# Altium PCB TE0123.V2_Placa_2022-08-20.pcbdoc (part 2 of 2)
Units mil, origin at the board's own origin, x right, y up, seen from the top; angles counter-clockwise.
Board outline 7202.22 x 3893.5 mil, 2 copper layers (Top Layer, Bottom Layer); 145 components, 165 nets, 586 pads, 199 vias.
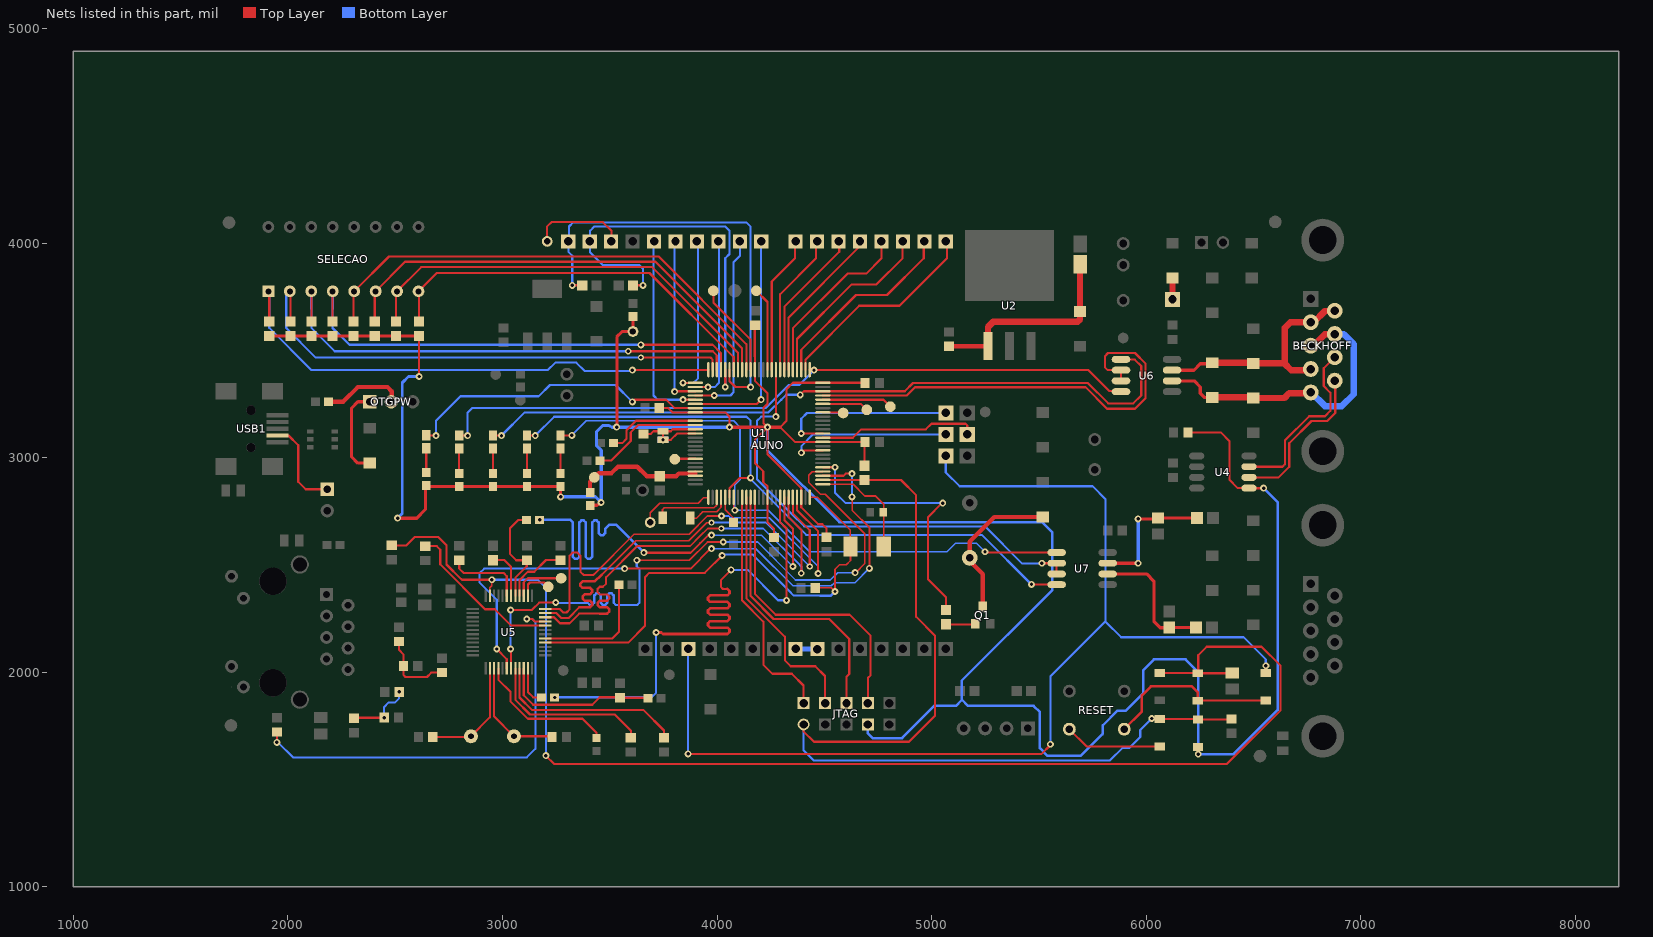
[diagram p2: the nets of this part, all layers, seen from the top]

## Via types
v1: diameter 32.28, hole 15.75, Top Layer to Bottom Layer, 193 vias
v2: diameter 28.35, hole 15.75, Top Layer to Bottom Layer, 6 vias

## Nets (pads, with @x,y where several pads share a name; then routed paths per layer and width w, separated by ;. In a path a pad name is that pad's centre, name@x,y a point inside that pad or via, vN(x,y) a via of type N, cw(c..) or ccw(c..) an arc to the next point about the centre after c; other vN are vias at no path point) (continued)
PTA13/LLWU_P4: R16.1 U1.43 | length 2788.5
  Top Layer w10: 4048,2388 4028,2388 4018,2398 4018,2418 4018,2429 v1(4066,2477) ; U1.43@4294.2,2815.6 4294.2,2699.3 4323.7,2669.8 v1(4323.7,2335.2)
  Top Layer w12: R16.1@3242.3,1882.3 3242.6,1882 v1(3243,1882) ; v1(3716,2185) 3739,2185 3749,2178 3749.8,2178 4048,2178 4058,2188 4058,2198 4048,2208 3968,2208 3958,2218 3958,2228 3968,2238 4048,2238 4058,2248 4058,2258 4048,2268 3968,2268 3958,2278 3958,2288 3968,2298 4048,2298 4058,2308 4058,2318 4048,2328 3968,2328 3958,2338 3958,2348 3968,2358 4048,2358 4058,2368 4058,2378 4048,2388
  Bottom Layer w10: v1(3243,1882) 3243,1883 3694.5,1883 3716,1904.5 v1(3716,2185) ; v1(4066,2477) 4142.6,2477 4284.4,2335.2 v1(4323.7,2335.2)
PTA14: R9.2 U1.44 | length 2433.1
  Top Layer w9.84: v1(3659,2557) 3877,2557 3920.9,2600.9 3959,2639 v1(3974,2639)
  Top Layer w10: U1.44@4313.9,2815.6 4313.9,2709.2 4353.3,2669.8 v1(4353.3,2492.6)
  Top Layer w12: R9.2@3173.2,2709.6 3173.6,2710 v1(3174,2710)
  Bottom Layer w8: v1(3974,2639) 4206.9,2639 v1(4353.3,2492.6)
  Bottom Layer w12: v1(3174,2710) 3316,2710 3328,2698 3328,2538 3338,2528 3348,2528 3358,2538 3358,2698 3368,2708 3378,2708 3388,2698 3388,2538 3398,2528 3408,2528 3418,2538 3418,2698 3428,2708 3438,2708 3448,2698 3448,2648 3458,2638 3468,2638 3478,2648 3478,2668 3498,2688 3528,2688 v1(3659,2557)
PTA15: U1.45 U5.34 | length 2136.6
  Top Layer w8: 3628,2588 3875,2588 3920.18,2633.18 3957,2670 v2(4020,2670)
  Top Layer w10: U5.34@3198.95,2256.1 3239.9,2256.1 3268,2228 3313,2228 3358,2273 3453,2273 ; 3488,2333 3498,2343 3498,2353 3488,2363 3453,2363 3443,2373 3443,2388 3453,2398 3468,2398 3483,2413 3483,2443 3628,2588 ; U1.45@4333.6,2815.6 4333.6,2722.4 4393,2663 4393,2494 ; v1@4392.6,2462.4 4393,2495
  Top Layer w12: 3453,2273 3488,2273 3498,2283 3498,2293 3495.7,2295.3 3488,2303 3453,2303 3443,2313 3443,2323 3453,2333 3488,2333
  Bottom Layer w8: v2(4020,2670) 4216,2670 4388,2498
  Bottom Layer w10: 4388,2498 4393,2493 4393,2461.8 v1(4392.6,2461.4)
PTA16: U1.46 U5.35 | length 2099.8
  Top Layer w8: 3462,2454 3621,2613 3867.5,2613 3952.5,2697 v2(3974,2697)
  Top Layer w10: U5.35@3198.95,2276.1 3249.9,2276.1 3273,2253 3308,2253 3358,2303 3373,2303 ; U1.46@4353.3,2815.6 4353.3,2740.7 4432,2662 4432,2493 v2@4429,2493
  Top Layer w12: 3373,2303 3408,2303 3418,2313 3418,2323 3415.7,2325.3 3408,2333 3383,2333 3373,2343 3373,2353 3383,2363 3408,2363 3418,2373 3418,2383 3408,2393 3373,2393 3363,2403 3363,2413 3373,2423 3429,2423 3462,2454
  Bottom Layer w8: v2@3965,2698 4227,2698 4425.5,2499.5 v2@4420,2494
  other v2: 4432.03,2492.6
PTA17: U1.47 U5.36 | length 2271
  Top Layer w8: 3425,2455 3613,2643 3870,2643 3955,2728 v1(4021,2728)
  Top Layer w10: U5.36@3198.95,2295.1 3265.9,2295.1 3283,2278 3298,2278 3313,2293 3313,2533 3313,2543 3328,2558 3348,2558 3363,2543 3363,2468 3378,2453 3423,2453 3425.5,2455.5 ; U1.47@4373,2815.6 4373,2754.9 4471.4,2656.6 4471.4,2492.6 v1(4471,2460)
  Bottom Layer w8: v1(4021,2728) 4055.1,2728 4062.1,2720 4244,2720 4471.4,2492.6
  Bottom Layer w10: v1(4471,2460) 4471.4,2460.4 4471.4,2492.6
PTA18: C30.2 MAIN.1 U1.50 U5.28 | length 2434.5
  Top Layer w8: U1.50@4432,2815.6 4468.4,2815.6 4621,2663 4621,2653.1 4621,2593 MAIN.1@4622,2586 4622,2521 4602,2501 4593.1,2501 4571,2501 4550,2480 v1(4550,2376) 4533,2393 C30.2@4457.85,2393
  Top Layer w9.84: U5.28@3198.9,2138.1 3585.3,2138.1 3664.3,2217.1 3664.3,2443.4 3684,2463.1 3943.1,2463.1 4028.7,2548.7 v1(4024,2544)
  Bottom Layer w10: v1@4028,2548 4167,2548 4333.9,2381.1 4358,2357 4433,2357 4480.1,2357
  Bottom Layer w12: 4480.1,2357 4531,2357 v1(4550,2376)
PTB0/LLWU_P5: U1.53 U5.18 | length 3086.6
  Top Layer w8: v1(4628.9,2817.4) 4630,2816.3 4630,2754 4711,2673 4711,2482 4710,2483 v1(4710,2484)
  Top Layer w9.84: v1(2973,2108) 3019.9,2061.1 U5.18@3019.9,2018.1
  Top Layer w10: v1(3569,2483) 3877,2483 3969,2575 3973,2575 v1(3974,2576) ; U1.53@4493,2915.9 4589.5,2915.9 4599.3,2925.7 v1(4628.9,2925.7)
  Bottom Layer w8: v1(3974,2576) 4181,2576 4354,2403 4533,2403 4547.7,2417 4643,2417 v1(4710,2484)
  Bottom Layer w9.84: v1(2973,2108) 2973,2337.5 2892,2418.5 2892,2443.9 2892,2461 2914,2483 v1(3569,2483) ; v1(4628.9,2925.7) v1@4628.98,2817.43
PTB1: U1.54 U5.19 | length 3083.7
  Top Layer w8: v1(3626,2522) 3871,2522 3956,2607 v1@4030,2607 ; U1.54@4493,2935.6 4444,2935 4427,2918 4427,2884 4482,2829 4505,2829 4689,2645 4689,2507 4646,2464 v1(4644,2464)
  Top Layer w9.84: v1(3038,2108) 3039.9,2106.1 U5.19@3039.9,2018.1 ; v1(3038,2290) 3137,2290 3151.6,2304.6 3152.5,2305.6 3170.8,2324 3248,2324 v1(3248,2325)
  Bottom Layer w8: v1@4030,2607 4189.7,2607 4366,2430 4527.96,2430 4561.96,2464 v1(4644,2464)
  Bottom Layer w9.84: v1(3038,2108) v1(3038,2290)
  Bottom Layer w10: v1(3248,2325) 3250,2323 3398,2323 3408,2313 3418,2313 3428,2323 ; 3518,2323 3528,2313 3628,2313 3638,2323 3638,2482 3626,2494 v1(3626,2522)
  Bottom Layer w12: 3428,2323 3428,2358 3438,2368 3448,2368 3458,2358 3458,2323 3468,2313 3478,2313 3488,2323 3488,2358 3495.7,2365.7 3498,2368 3508,2368 3518,2358 3518,2323
  other v1: 4029,2607
PTB2: R12.2 U1.55 | length 1261.8
  Top Layer w9.84: U1.55@4493,2955.3 v1(4550.1,2955.2)
  Top Layer w10: v1(5052.1,2787.9) 5047.9,2787.9 4983,2723 4983,2433 5068,2348 R12.2@5068,2289.9
  Bottom Layer w9.84: v1(4550.1,2955.2) 4550.1,2837.2 4599.3,2787.9 v1(5052.1,2787.9)
PTB11: AUNO.34 U1.59 | length 831.4
  Top Layer w10: v1(4393,3023) 4404.1,3034.1 U1.59@4493,3034.1
  Bottom Layer w10: v1(4393,3023) 4393,3054 4447.4,3108.4 AUNO.34@5066.3,3108.4
PTB16: AUNO.36 U1.62 | length 745.8
  Top Layer w10: U1.62@4493,3093 4633,3093 4671.9,3131.9 4973.3,3131.9 4999.8,3158.4 5158.4,3158.4 5166.3,3150.5 AUNO.36@5166.3,3108.4
PTB17: AUNO.33 U1.63 | length 854.1
  Top Layer w10: v1(4392.6,3112.7) 4492.9,3112.7 U1.63@4493,3112.8
  Bottom Layer w10: v1(4392.6,3112.7) 4392.6,3181.6 4419.4,3208.4 AUNO.33@5066.3,3208.4
PTC2: U1.72 U6.2 U6.3 | length 2141.6
  Top Layer w9.84: U6.3@5883,3358 U6.2@5883,3408
  Top Layer w10: U1.72@4493,3290 4885,3290 4923,3328 5718,3328 5818,3228 5948,3228 5998,3278 5998,3438 5948,3488 5822.6,3488 5808,3472.6 5808,3422 5822,3408 U6.2@5883,3408
PTC3/LLWU_P7: RXM.1 U1.73 U6.1 | length 3422
  Top Layer w9.84: RXM.1@2955.6,3103.49 v1(2995,3102.9) ; v1(4388,3293) 4404.7,3309.7 U1.73@4493,3309.7
  Top Layer w10: U1.73@4493,3309.7 4874.8,3309.7 4913.3,3348 5727.9,3348 5823,3253 5892.5,3253 5940.4,3253 5977.3,3290 5977.3,3427.6 5947.8,3457.2 U6.1@5883,3458
  Bottom Layer w10: v1@2995,3103 3103.3,3211.1 4240,3211 4299,3270 4322,3293 v1(4388,3293)
PTC4/LLWU_P8: TXM.1 U1.76 U6.4 | length 3337.7
  Top Layer w9.84: TXM.1@2797.9,3103.49 v1(2837.5,3102.9)
  Top Layer w10: U1.76@4432,3410 4432,3408 5731.2,3408 5829.7,3310 5881.4,3310 U6.4@5883,3308
  Bottom Layer w10: v1@2837.5,3103 2837.5,3210.8 2857.9,3231 4225.9,3231 4289,3294 4334,3339 4382.8,3339 v1@4451.8,3408
  other v1: 4451.8,3407.9
PTC5/LLWU_P9: AUNO.1 U1.77 | length 983.4
  Top Layer w10: U1.77@4412.3,3410 4412.3,3457.2 4663.2,3708 4850.2,3708 5071.8,3929.6 5071.8,4002.9 AUNO.1@5066.3,4008.4
PTC6/LLWU_P10: AUNO.2 U1.78 | length 920.3
  Top Layer w10: U1.78@4392.7,3410 4392.7,3502.7 4648,3758 4791.9,3758 4963.5,3929.7 4963.5,4005.6 AUNO.2@4966.3,4008.4
PTC7: AUNO.3 U1.79 | length 870.3
  Top Layer w10: U1.79@4373,3410 4373,3553 4628,3808 4743.4,3808 4865.1,3929.7 4865.1,4007.2 AUNO.3@4866.3,4008.4
PTC8: AUNO.4 U1.80 | length 820.6
  Top Layer w10: U1.80@4353.3,3410 4353.3,3603.3 4608,3858 4695,3858 4766.8,3929.8 AUNO.4@4766.3,4008.4
PTC9: AUNO.5 U1.81 | length 737.8
  Top Layer w10: U1.81@4333.6,3410 4333.6,3653.6 4668.2,3988.2 4668.2,4006.5 AUNO.5@4666.3,4008.4
PTC10: AUNO.6 U1.82 | length 705.8
  Top Layer w10: U1.82@4313.9,3410 4313.9,3703.9 4569.8,3959.8 4569.8,4004.9 AUNO.6@4566.3,4008.4
PTC11/LLWU_P11: AUNO.7 U1.83 | length 669.7
  Top Layer w10: U1.83@4294.2,3410 4294.2,3762.3 4461.5,3929.6 4461.5,4003.6 AUNO.7@4466.3,4008.4
PTC13: AUNO.8 U1.85 | length 644.5
  Top Layer w10: U1.85@4254.9,3410 4254.9,3821.4 4363.1,3929.6 4363.1,4005.2 AUNO.8@4366.3,4008.4
PTC17: R15.1 SELECAO.5 U1.91 | length 2326.3
  Top Layer w10: R15.1@2306.1,3634.35 2306.1,3773.3 SELECAO.5@2308.5,3775.7 2470.8,3938 3728,3938 4136.7,3529.3 U1.91@4136.7,3410
PTD4/LLWU_P14: R18.1 SELECAO.4 U1.97 | length 2249
  Top Layer w10: R18.1@2208.1,3634.35 2208.1,3775.3 SELECAO.4@2208.5,3775.7 ; v1(3644.6,3526.1) 3979.3,3526.1 4018.6,3486.8 U1.97@4018.6,3410
  Bottom Layer w10: SELECAO.4@2208.5,3775.7 2207.6,3604.8 2286.4,3526.1 v1(3644.6,3526.1)
PTE2/LLWU_P1: AUNO.13 U1.3 | length 800.5
  Top Layer w9.84: v1(3802,3308) 3802,3309.7 U1.3@3898.6,3309.7
  Bottom Layer w10: v1(3802,3308) 3802,3329.2 3802.1,3329.3 3802.1,4004.2 AUNO.13@3806.3,4008.4
PTE6: HB.1 U1.7 | length 1445.9
  Top Layer w9.84: HB.1@2644.3,3103.89 2688.9,3103.9 v1(2689.9,3102.9)
  Top Layer w10: v1(3605.2,3260.4) 3615,3270.2 3762.8,3270.2 3802.1,3230.9 U1.7@3898.6,3230.9
  Bottom Layer w10: v1@2689.9,3103 2689.9,3171.8 2804.1,3286 3168.4,3286 3221.4,3339 3526.5,3339 v1@3605.2,3260
Q1_1: Q1.1 R12.1 | length 137.5
  Top Layer w10: R12.1@5068,2222.95 5200.75,2222.95 Q1.1@5204.1,2226.3
Q1_3: D13.1 Q1.3 SPK.- | length 715.1
  Top Layer w20: Q1.3@5239.1,2306.3 5239.1,2456.9 5178,2518 SPK.-@5178,2533 5178,2586 5178,2608.7 5292.3,2723 D13.1@5518.05,2723
R14_1: R9.1 R14.1 U5.41 | length 493.6
  Top Layer w9.84: U5.41@3059.9,2356.1 3059.9,2439.9 3113.1,2493.1 3113.1,2520.6 R14.1@3114.5,2522 3064,2522 3034.4,2551.6 3034.4,2669.8 3073.7,2709.2 R9.1@3112.61,2709.6
R17_1: R17.1 U5.40 | length 303.8
  Top Layer w10: U5.40@3078.9,2356.05 3078.9,2428.9 3118,2468 3148,2468 3203,2523 3270,2523 R17.1@3270.6,2522.4
R22_2: HB.2 R22.2 | length 112.4
  Top Layer w9.84: HB.2@2644.3,3043.29 2644.5,3043.1 R22.2@2644.4,2931
R23_2: R23.2 TXM.2 | length 116.2
  Top Layer w9.84: R23.2@2797.9,2926.7 TXM.2@2797.9,3042.89
R25_2: R25.2 TXE.2 | length 116.2
  Top Layer w9.84: R25.2@3113.8,2926.7 TXE.2@3113.8,3042.89
R27_2: R27.2 R36.2 U5.22 | length 739.9
  Top Layer w10: U5.22@3098.9,2018.05 3098.9,1892.1 3143,1848 3418,1848 3453,1883 3546.15,1883 R27.2@3548,1881.15 ; R27.2@3548,1881.1 3674.9,1881.1 R36.2@3678,1878
R29_2: R29.2 U5.32 | length 752.5
  Top Layer w10: R29.2@2640,2587.6 2693.4,2587.6 2709.6,2571 2709.6,2503 2918.6,2293.4 2963.9,2293.4 3040.3,2217 U5.32@3198.9,2217
R30_2: R30.2 U5.21 | length 907
  Top Layer w9.84: U5.21@3078.9,2018.1 3078.9,1882.1 3138,1823 3658,1823 3753,1728 R30.2@3753,1694.9
R31_2: R31.2 U5.20 | length 777.5
  Top Layer w9.84: U5.20@3059.9,2018.1 3059.9,1871.1 3128,1803 3523,1803 3598,1728 R31.2@3598,1694.9
R32_2: R32.2 U5.16 | length 663.7
  Top Layer w9.84: U5.16@2980.9,2018.05 2980.9,1965.1 3038,1908 3038,1862.9 3118.1,1783 3372.9,1783 3438,1718 R32.2@3438,1693
R38_1: OTGPW.2 R38.1 | length 381.4
  Top Layer w20: R38.1@2188.5,3260.4 2256.9,3260.4 2325.7,3329.3 2463.5,3329.3 2483.2,3309.6 2483.2,3262 OTGPW.2@2481.5,3260.3
R40_1: R40.1 U5.42 | length 232
  Top Layer w10: R40.1@2956.2,2522.2 3008.1,2522.9 3039.9,2491.1 U5.42@3039.9,2356.05
R41_1: R41.1 U5.43 | length 367.4
  Top Layer w9.84: R41.1@2798.5,2522 2798.16,2521.66 2798.16,2482.81 2817.85,2463.12 3004.85,2463.12 3019.9,2448.07 U5.43@3019.9,2356.1
R44_1: C27.2 R44.1 R46.1 | length 307.9
  Top Layer w10: C27.2@2308,1784.9 2311.1,1788 v1(2448,1788)
  Bottom Layer w10: v1(2448,1788) 2448,1838 2468,1858 2498,1858 2518,1878 v1(2518,1908)
R47_1: C28.1 R47.1 R48.1 | length 355.5
  Top Layer w10: C28.1@2517.1,2143.1 2517.1,2103.9 2538,2083 2538,2028.89 R48.1@2538.12,2028.77 2538,2028.65 2538,1988 2548,1978 2648,1978 2668.12,1998.12 R47.1@2717.13,1998.12
RESET_3: D3.1 RESET.3 | length 454.6
  Top Layer w10: RESET.3@5642.3,1734.3 5722.8,1653.8 D3.1@6063.6,1653.8
RESET_4: D4.1 D5.1 RESET.4 | length 836.8
  Top Layer w10: D4.1@6241.1,1867.3 6556.4,1867.3 D5.1@6557.2,1868.1
  Top Layer w12: RESET.4@5898.2,1734.3 5980,1816 5980,1892 6022,1934 6213,1934 6240,1907 6240,1868.4 D4.1@6241.1,1867.3
RESET_B: C2.2 D3.2 D6.2 JTAG.1 R2.1 U1.52 | length 4482.8
  Top Layer w9.84: v1(6026.5,1784) 6028.7,1781.8 D3.2@6063.6,1781.8
  Top Layer w10: JTAG.1@4403.3,1756.3 4402.5,1724.9 4451.7,1675.7 4894.6,1675.7 5016,1797 5016,2170.5 4928,2258 4928,2825 4857.4,2896.1 4687.4,2896.1 4687.2,2896.3 U1.52@4493,2896.3 ; D3.2@6063.6,1781.8 6239.6,1781.8 D6.2@6241.8,1779.6 6395.9,1779.6 C2.2@6398.5,1782.2
  Bottom Layer w10: JTAG.1@4403.3,1756.3 4403.3,1635.5 4449.7,1589 5831.7,1589 5891,1648 5923,1648 5973,1698 5972.8,1730.3 v1(6026.5,1784)
RST#: C14.2 D4.2 D12.2 R8.1 U5.47 | length 6360.3
  Top Layer w8: U5.47@2940.9,2356.05 2940.9,2393.9 2950,2403 v1(2950,2431)
  Top Layer w10: R8.1@2484,2592 2484,2591.1 2552.1,2591.1 2591.5,2630 2699.7,2630 2739.1,2591.1 2739.1,2502 2808,2433.6 2810.6,2431 v1(2950,2431) ; v1(3202,1611) 3241,1572 6375.5,1572 6626.9,1823.4 6626.9,2030 6538.3,2118.6 6282.4,2118.6 6243,2079.3 6243,1993.4 D4.2@6241.1,1995.3 ; D12.2@6064.2,1996.5 6239.9,1996.5 D4.2@6241.1,1995.3 ; C14.2@6400.5,1996.6 6391.5,1995.3 D4.2@6241.1,1995.3
  Bottom Layer w10: v1(2950,2431) 3164.9,2431 3201.7,2394.2 3202,2393.9 v1(3202,1611)
RSTSHIELD: AUNO.30 AUNO.35 D5.2 | length 5206.7
  Top Layer w9.84: D5.2@6557.2,1996.1 6558,1996.9 v1(6558,2030)
  Top Layer w10: v1(3865,1619) 3866,1618 5511,1618 5554,1661 v1(5554,1664)
  Bottom Layer w9.84: v1(3865,1619) 3865,2104 AUNO.30@3866.3,2108.4
  Bottom Layer w10: AUNO.35@5066.3,3008.4 5066.3,2931.2 5130.8,2866.7 5750.9,2866.7 5810,2807.6 5810,2236.7 ; v1(5554,1664) 5554,1980.7 5810,2236.7 ; v1(6558,2030) 6558,2059.6 6454.6,2163 5883.7,2163 5810,2236.7
RXE_2: R26.2 RXE.2 | length 116.2
  Top Layer w9.84: R26.2@3270,2926.7 RXE.2@3270,3042.89
RXM_2: R24.2 RXM.2 | length 116.2
  Top Layer w9.84: R24.2@2955.6,2926.7 RXM.2@2955.6,3042.89
S$12081: 
S$12083: 
S$12085: 
S$12087: 
S$12089: 
S$13048: 
S$13052: 
S$13055: 
S$13059: 
S$13061: 
S$13065: 
S$18142: pad.539@4808,3238 U1.71 | length 328.4
  Top Layer w10: U1.71@4493,3270.3 4775.7,3270.3 pad.539@4808,3238
S$18144: pad.539@4698,3223 U1.70 | length 216.4
  Top Layer w10: U1.70@4493,3250.6 4670.4,3250.6 pad.539@4698,3223
S$18146: pad.539@4588,3208 U1.68 | length 96.3
  Top Layer w10: U1.68@4493,3211.2 4584.8,3211.2 pad.539@4588,3208
S$19341: pad.539@3688,2698 U1.26 | length 346.7
  Top Layer w8: pad.539@3688,2698 3688,2743 3733,2788 3912,2788 3937,2813 3957,2813 U1.26@3959.6,2815.6
S$19352: RTC.1 U1.28 | length 336.3
  Top Layer w8: RTC.1@3746,2720 3746,2758 3754,2766 3986,2766 3998.9,2778.9 U1.28@3998.9,2815.6
S$29859: RTC.2 U1.29 | length 210.8
  Top Layer w8: RTC.2@3875.7,2718.1 3904.1,2718.1 3923,2737 3934,2748 3998,2748 4018.6,2768.6 U1.29@4018.6,2815.6
S$30932: pad.539@3983,3778 U1.90 | length 439.8
  Top Layer w10: pad.539@3983,3778 3983,3723 4156.4,3549.6 U1.90@4156.4,3410
S$31568: pad.539@4183,3778 U1.86 | length 389.6
  Top Layer w10: pad.539@4183,3778 4235.2,3725.8 U1.86@4235.2,3410
S$43030: pad.539@3803,2993 U1.19 | length 96.3
  Top Layer w10: pad.539@3803,2993 3804.7,2994.7 U1.19@3898.6,2994.7
S$61242: 
S$61244: 
S$61246: 
S$61866: 
S$69002: pad.539@3273,2438 U5.39 | length 244.8
  Top Layer w10: U5.39@3098.9,2356.1 3098.9,2418.9 3118,2438 pad.539@3273,2438
S$69008: pad.539@3213,2398 U5.38 | length 159
  Top Layer w10: U5.38@3118.9,2356.1 3118.9,2408.9 3128,2418 3193,2418 pad.539@3213,2398
S$72862: U1.30 VBAT+.1 | length 133.6
  Top Layer w8: U1.30@4038.3,2815.6 4038.3,2757.7 4048,2748 4077,2719 VBAT+.1@4077,2698
S$73513: AUNO.16 pad.539@3208,4008 | length 448.6
  Top Layer w10: pad.539@3208,4008 3208,4078 3228,4098 3468,4098 3508,4058 3508,4053.5 3508,4006.7 AUNO.16@3506.3,4008.4
S$84447: 
S$84451: 
S$85002: 
S$164278: AUNO.25 pad.25 | length 101.9
  Bottom Layer w25: AUNO.25@4366.3,2108.4 4467.6,2108.4 pad.25@4468,2108
S$169262: D21.1 pad.38 | length 100
  Top Layer w30: pad.38@6123,3738 D21.1@6123.05,3838
S$192734: 
S$192736: 
TCK/SWDCLK: JTAG.2 U1.34 | length 1130.6
  Top Layer w10: U1.34@4117.1,2815.6 4117.1,2333.9 4216,2235 4216,2035 4258,1993 4348,1993 4403.1,1937.9 JTAG.2@4403.35,1856.25
TDI: JTAG.4 U1.35 | length 1179.3
  Top Layer w10: U1.35@4136.7,2816 4136.7,2344.3 4316,2165 4316,2055 4343,2028 4458,2028 4503.4,1982.6 JTAG.4@4503.4,1856
TDO/SWO: JTAG.6 U1.36 | length 1307.7
  Top Layer w10: U1.36@4156.4,2816 4156.4,2355 4263,2248 4523,2248 4616,2155 4616,1991.6 4603.4,1978.6 JTAG.6@4603.4,1856
TMS/SWDIO: JTAG.8 U1.37 | length 1390.9
  Top Layer w10: U1.37@4176.1,2816 4176.1,2364.9 4273,2268 4618,2268 4716,2170 4716,1986 4703.4,1973.4 JTAG.8@4703.4,1856
U1_3.3V: C6.2 C8.2 C9.2 C11.2 C12.2 C13.1 C29.2 D6.1 FB1.2 JTAG.7 pad.539@3608,3588 R2.2 R4.2 R10.2 R11.2 R13.2 R15.2 R18.2 R19.2 R20.2 R21.2 R22.1 R23.1 R24.1 R25.1 R26.1 U1.8 U1.40 U1.48 U1.61 U1.75 U1.89 U4.5 | length 15303.2
  Top Layer w9.84: U1.8@3898.6,3211.2 4038.3,3211.2 4058,3191.5 4058,3142.4 v1(4057.9,3142.3) ; U1.89@4176.1,3410 4176.1,3358.8 4235.2,3299.7 4235.2,3250.5 4216,3231.3 4216,3161.4 v1(4235.2,3142.2) ; U1.40@4235.2,2815.6 4235.2,2699.3 4264.7,2669.8 C8.2@4264.7,2628.35 ; U1.40@4235.2,2816 4235.2,2867 4215.5,2886 4215.5,2936 4176.1,2975 4176.1,3083.2 4215.5,3122 v1(4235.2,3142.2) ; U1.61@4493,3073.4 4363,3073.4 4294.2,3142.2 4323.7,3171.7 4323.7,3319.4 4353.3,3349 U1.75@4493,3349 4689.8,3349 C12.2@4689.9,3348.9 ; C9.2@4510.5,2628.5 4510.8,2628.7 4510.8,2669.8 4491.1,2689.5 4471.4,2689.5 4392.7,2768.2 U1.48@4392.7,2815.6 4392.7,2858.3 4235.2,3015.9 v1(4235.2,3142.2) ; R2.2@4687.4,2962.95 4687.4,3070.9 C11.2@4689.9,3073.4 ; D6.1@6241.8,1651.6 6241.8,1619.2 v1(6243,1618)
  Top Layer w10: R10.2@2611.1,3567.5 v1@2611.2,3378.5 ; C6.2@3731.25,3230.8 3772.6,3230.8 3792.2,3211.2 U1.8@3898.6,3211.2 ; U1.89@4176.1,3410 4176,3529.5 4176,3618 C13.1@4178,3617.95 ; U1.61@4493,3073.4 C11.2@4689.9,3073.4 ; C29.2@6194.95,3118 6348,3118 6388,3078 6388,2898 6428,2858 U4.5@6480,2858
  Top Layer w12: U4.5@6480,2858 v1(6548,2858)
  Top Layer w14.96: R21.2@1912.4,3567.5 2010.9,3567.5 2109.3,3567.5 2208.1,3567.5 2306.1,3567.5 2404.6,3567.5 2503,3567.5 R10.2@2611.1,3567.5 ; v1(2511,2718) 2600.3,2718 2640.7,2758.4 2640.7,2866.7 R22.1@2644.4,2870.4 ; R22.1@2644.4,2870.3 2648.7,2866 2797.9,2866 2955.6,2866 3113.8,2866 R26.1@3270,2866 ; R26.1@3270,2866.1 3270,2818 v1(3270.6,2817.4) ; R4.2@3408.6,2778 3440,2778 v1(3460,2791) ; v1@4057.9,3142.2 v1@4235.2,3142.1 ; v1(4235.2,3142.2) 4294.2,3142.2
  Top Layer w15: v1@3533,3142 3533,3563 3558,3588 pad.539@3608,3588 FB1.2@3608,3658
  Bottom Layer w12: v1(4235.2,3142.2) 4235.2,3034 4569.8,2699.3 5514.7,2699.3 5563,2651.1 5563,2383 5140.7,1960.7 5140.7,1872.6 ; JTAG.7@4703.35,1756.25 4703.1,1714.9 4725,1693 4862,1693 5012,1843 5113,1843 5140.7,1870.7 5140.7,1872.6 ; v1(6548,2858) 6613,2793 6613,1823 6408,1618 v1(6243,1618) 6243,2001 6184,2060 6036.3,2060 5987.1,2010 5987.1,1902 5905.8,1821 5865.7,1821 5798,1752.7 5798,1713 5795.5,1710 5695.1,1610 5541,1610 5504.8,1646 5504.8,1814 5475.3,1843 5170.2,1843 5140.7,1872.6
  Bottom Layer w13: v1(2511,2718) 2532.4,2739.4 2532.4,2761.4 2532.4,2767.39 2532.4,3349 2562,3379 v1@2611.1,3379
  Bottom Layer w14.96: v1(3270.6,2817.4) 3433.6,2817.4 v1(3460,2791) 3460,3034 3438,3056 3438,3121 3467.2,3150 3495.6,3150 3511,3142 3792.1,3142 ; v1(3532.3,3142.2) v1@4057.9,3142.2
  other v1: 2611.1,3378.5
U1_12: pad.539@3748,3083 pad.539@3748,3123 R1.2 U1.12 U1.13 | length 452.9
  Top Layer w10: R1.2@3658,3109.9 3689.9,3109.9 3703,3123 pad.539@3748,3123 ; U1.13@3898.6,3112.8 3813.8,3112.8 3784,3083 v1(3748,3083) pad.539@3748,3123 ; U1.12@3898.6,3132.5 3793.5,3132.5 3784,3123 pad.539@3748,3123
U1_22: C10.2 pad.539@3428,2908 R4.1 U1.22 U1.23 | length 631.2
  Top Layer w9.84: U1.23@3898.6,2915.9 U1.22@3898.6,2935.6
  Top Layer w19.68: 3898.6,2925.7 3821.75,2925.7 3809.96,2913.91 C10.2@3733.19,2913.88 ; C10.2@3733.19,2913.88 3723.7,2914 C10.2@3733.19,2913.88
  Top Layer w20: R4.1@3408.6,2838.5 3408,2839.09 3408,2888 3448,2928 3508,2928 3538,2958 3628,2958 3672.15,2913.85 C10.2@3733.2,2913.85
U1_51: MAIN.2 R5.2 U1.51 | length 520.1
  Top Layer w8: U1.51@4493,2876.6 4634.4,2876.6 4690,2821 4739,2821 4777,2783 4777,2586.6 MAIN.2@4776.36,2585.96
U2_1: C3.2 D7.2 F1.2 pad.554@5693,3918 U2.1 | length 955.4
  Top Layer w20: C3.2@5081.7,3519.2 5262.2,3519.2 U2.1@5263,3520
  Top Layer w30: U2.1@5263,3520 5263,3609.1 5288.3,3634.4 5682,3634.4 5691.9,3644.2 5691.9,3681.7 D7.2@5691.9,3681.8 ; D7.2@5691.95,3681.8 5691.95,3883.95 F1.2@5693,3885
U4_6: BECKHOFF.6 U4.6 | length 742.9
  Top Layer w10: U4.6@6480,2908 6618,2908 6667,2957 6667,3067 6771,3171 6845,3171 6882,3208 6882,3356.4 BECKHOFF.6@6879.3,3359.1
U4_7: BECKHOFF.7 U4.7 | length 836
  Top Layer w10: U4.7@6480,2958 6636,2958 6647,2969 6647,3080 6760,3193 6834,3193 6859,3218 6859,3303 6828,3334 6828,3417 6876.3,3465.3 BECKHOFF.7@6879.3,3468.1
U5_23: R16.2 U5.23 | length 184.6
  Top Layer w9.84: U5.23@3118.9,2018.1 3118.9,1906.15 3142.64,1882.41 3181.59,1882.41 R16.2@3181.7,1882.3
U5_29: R28.1 U5.29 | length 577.1
  Top Layer w10: U5.29@3198.95,2157.1 3512.1,2157.1 3543,2188 3543,2407.4 R28.1@3542.4,2408
U5_33: R37.2 U5.33 | length 2025.8
  Top Layer w10: v1(1948,1673) R37.2@1948,1721.1 ; v1(3113,2248) 3138,2248 3149.9,2236.1 U5.33@3198.95,2236.1
  Bottom Layer w10: v1(1948,1673) 1953,1673 2023,1603 3113,1603 3153,1643 3153,2232.9 3138.1,2248 v1(3113,2248)
U6_6: BECKHOFF.1 BECKHOFF.3 BECKHOFF.8 D14.2 D17.2 U6.6 | length 1433.3
  Top Layer w15: U6.6@6121,3358 6224.1,3358 6252.9,3329.3 6252.9,3299.7 6272.6,3280 6307.1,3280 D14.2@6308,3281
  Top Layer w30: D14.2@6308,3281 6496.2,3281 D17.2@6498.9,3278.3 6644.8,3278.3 6666.3,3299.7 6762.9,3299.7 BECKHOFF.1@6767.3,3304.1 ; BECKHOFF.3@6767.3,3522.1 6780.4,3522.1 6833.6,3575.3 6878.5,3575.3 BECKHOFF.8@6879.3,3576.1
  Bottom Layer w30: BECKHOFF.1@6767.3,3304.1 6770.2,3304.1 6833.6,3240.7 6912.3,3240.7 6968,3296.3 6968,3529.5 6922.2,3575.3 BECKHOFF.8@6879.3,3576.1
U6_7: BECKHOFF.2 BECKHOFF.4 BECKHOFF.9 D14.1 D15.2 U6.7 | length 1109.6
  Top Layer w15: U6.7@6121,3408 6223.3,3408 6252.9,3437.5 6302.5,3437.5 D14.1@6308,3443
  Top Layer w30: D14.1@6308,3443 6495.2,3443 D15.2@6498.9,3439.3 6644.8,3439.3 ; BECKHOFF.2@6767.3,3413.1 6762.2,3408 6676.1,3408 6644.8,3439.3 ; BECKHOFF.9@6879.3,3685.1 6877.8,3683.6 6833.6,3683.6 6781.1,3631.1 BECKHOFF.4@6767.3,3631.1 6672.8,3631.1 6646.6,3604.8 6646.6,3441.1 6644.8,3439.3
U7_6: R34.1 R39.2 U7.6 | length 625.9
  Top Layer w14.96: U7.6@5821,2458 6002.09,2458 6036.34,2423.75 6036.34,2236.75 6065.87,2207.22 6107.22,2207.22 R34.1@6108.05,2208 R39.2@6233.2,2208
U7_7: R33.1 R35.2 U7.7 | length 630.7
  Top Layer w14.96: U7.7@5821,2508 v1(5963.1,2508) ; v1(5963.1,2714.7) 6051.7,2714.7 R33.1@6056,2719 ; R33.1@6056,2719 R35.2@6237.1,2719.1
  Bottom Layer w14.96: v1(5963.1,2508) v1(5963.1,2714.7) v1@5967.44,2719.03
UART0_CTS_B: R19.1 SELECAO.3 U1.98 | length 2322.2
  Top Layer w10: SELECAO.3@2108.5,3775.7 2109.3,3774.9 R19.1@2109.3,3634.35 ; v2(3586,3496) 3979.8,3496 3998.9,3476.9 U1.98@3998.9,3410
  Bottom Layer w10: SELECAO.3@2108.5,3775.7 2109,3605 2218,3496 v2(3586,3496)
UART0_RX: R20.1 SELECAO.2 U1.99 | length 2410.2
  Top Layer w10: SELECAO.2@2008.5,3775.7 2010.9,3773.3 R20.1@2010.9,3634.35 ; v2(3644.6,3467.1) 3969.4,3467.1 3979.3,3457.2 U1.99@3979.3,3410
  Bottom Layer w10: SELECAO.2@1989.3,3775.1 1991.6,3772.8 1991.6,3604.2 2129.3,3466.5 v2(3644.6,3467.1)
UART0_TX: R21.1 SELECAO.1 U1.100 | length 2477
  Top Layer w10: SELECAO.1@1908.5,3775.7 1912.4,3771.8 R21.1@1912.4,3634.35 ; v1(3605.2,3408) 3957.6,3408 U1.100@3959.6,3410
  Bottom Layer w10: SELECAO.1@1909,3775.7 1912.3,3772 1912.3,3605 2107,3410 3211.5,3408.4 3246.5,3443 3344.1,3443 3381.9,3405.2 3605.2,3404.7 v1(3605.2,3408)
UART1_RTS_B: AUNO.10 U1.4 | length 900.4
  Top Layer w9.84: U1.4@3898.6,3290 v1(3987,3290)
  Bottom Layer w10: v1(3987,3290) 4062.6,3290 4076.8,3304.2 4076.8,3910.1 4080.9,3914.2 4106.3,3940.1 AUNO.10@4106.3,4008.4
UART1_RX: AUNO.11 U1.2 | length 779.3
  Top Layer w9.84: U1.2@3898.6,3329.3 3958,3329.3 v1(3958,3329)
  Bottom Layer w10: v1(3958,3329) 3988.9,3329 4008.8,3348.9 4008.8,4005.9 AUNO.11@4006.3,4008.4
UART1_TX: AUNO.12 U1.1 | length 775.6
  Top Layer w10: v1(3841.5,3348.9) U1.1@3898.6,3349
  Bottom Layer w10: v1(3841.5,3348.9) 3890.6,3348.9 3910.4,3368.6 3910.4,4004.3 AUNO.12@3906.3,4008.4
UART2_CTS_B: R10.1 SELECAO.8 U1.94 | length 1867.7
  Top Layer w10: R10.1@2611.1,3634.35 2611.1,3773.1 SELECAO.8@2608.5,3775.7 2693.6,3860.8 3685.3,3860.8 4077.7,3468.2 U1.94@4077.7,3410
UART2_RTS_B: R11.1 SELECAO.7 U1.93 | length 2023
  Top Layer w10: R11.1@2503,3634.35 2503,3770.2 SELECAO.7@2508.5,3775.7 2620.8,3888 3698,3888 4097.4,3488.6 U1.93@4097.4,3410
UART2_RX/I2C0_SCL: AUNO.18 R49.2 U1.95 | length 2104.1
  Top Layer w9.84: U1.95@4058,3410 4058,3356.9 4085.8,3329.3 v1(4156.5,3329.1)
  Top Layer w12: v1(3324.9,3803.4) 3369.7,3803.4 R49.2@3371.1,3802
  Bottom Layer w9.84: v1@4156.4,3329.3 v1(4156.5,3329.1)
  Bottom Layer w10: v1(3324.9,3803.4) 3324.9,3941.1 3308,3958 3308,4006.7 AUNO.18@3306.3,4008.4 3310,4012.1 3310,4077.3 3329.7,4097 4102.5,4097 4136.7,4097 4156.5,4077.2 v1(4156.5,3329.1)
UART2_TX/I2C0_SDA: AUNO.17 R50.1 U1.96 | length 1988.2
  Top Layer w9.84: v1(4038.3,3329.3) U1.96@4038.3,3410
  Top Layer w12: R50.1@3608.05,3802 3609.4,3803.4 v1(3654.9,3803.4)
  Bottom Layer w10: v1(3654.9,3803.4) 3654.9,3881.1 3638,3898 3468,3898 3408,3958 3408,4006.7 AUNO.17@3406.3,4008.4 3408.4,4010.5 3408.4,4057.6 3428.1,4077.3 4038.3,4077.3 4058,4057.6 4058,3949.3 4038.3,3929.6 v1(4038.3,3329.3)
UART3_RTS_B: R13.1 SELECAO.6 U1.92 | length 2174.7
  Top Layer w10: R13.1@2404.6,3634.35 2404.6,3771.8 SELECAO.6@2408.5,3775.7 2545.8,3913 3713,3913 4117.1,3508.9 U1.92@4117.1,3410
UART3_RX: AUNO.9 U1.6 | length 1053.6
  Top Layer w9.84: U1.6@3898.6,3250.6 4186,3250.6 v1(4205.6,3270.2)
  Bottom Layer w10: v1(4205.6,3270.2) 4205.6,4007.7 AUNO.9@4206.3,4008.4
UART3_TX: AUNO.14 U1.5 | length 922.6
  Top Layer w10: v1(3841.5,3270.2) U1.5@3898.6,3270.3
  Bottom Layer w10: AUNO.14@3706.3,4008.4 3703.7,4005.8 3703.7,3289.9 3723.4,3270.2 v1(3841.5,3270.2)
UART4_RTS_B: U1.84 U7.2 U7.3 | length 2196.9
  Top Layer w9.84: v1(4274.5,3191.5) U1.84@4274.5,3410 ; v1(5514.3,2508) 5520.2,2508 U7.2@5583,2508 U7.3@5583,2458
  Bottom Layer w10: v1(4274.5,3191.5) 4205.3,3191.5 4186,3171.8 4186,2942 4186,2899.8 4346.6,2739.5 4406.6,2679.7 5248.8,2679.7 5420.9,2507.2 v1(5514.3,2508)
UART4_RX/I2C0_SDA: RXE.1 U1.32 U7.1 | length 2955
  Top Layer w8: U1.32@4077.7,2815.6 4078,2755 v1(4083,2755)
  Top Layer w9.84: RXE.1@3270,3103.49 3270.5,3104 v1(3323,3104) ; v1(5249,2561.5) 5252.5,2558 U7.1@5583,2558
  Bottom Layer w8: v1(3323,3104) 3390.8,3171.8 4077.6,3171.8 4107.2,3142 4107.2,2897.2 4083,2873 v1(4083,2755) 4238.6,2755 4432.1,2561.5 5071.8,2561.5 5111.6,2600.9 5209.7,2600.9 v1@5249,2561
UART4_TX/I2C0_SCL: TXE.1 U1.31 U7.4 | length 3156.3
  Top Layer w9.84: TXE.1@3113.8,3103.49 3114.4,3102.9 v1(3152.5,3102.9) ; U1.31@4058,2815.6 4058,2856.8 4107.2,2906 4156.3,2906 v1(4156.5,2906.2) ; v1(5465.9,2409.6) 5469.4,2408 U7.4@5583,2408
  Bottom Layer w10: v1@3152.5,3103 3241.1,3191 4137,3191 4156.5,3171.7 v1(4156.5,2906.2) 4156.5,2899.5 4415.7,2640.3 5234,2640.3 5467.8,2406.4 v1(5465.9,2409.6)
USB0_DM: R43.2 U1.11 | length 535.9
  Top Layer w10: R43.2@3455.01,2986 3506,2986 3598,3078 3598,3118 3632.2,3152.2 U1.11@3898.6,3152.2
USB0_DP: R42.2 U1.10 | length 447.1
  Top Layer w10: R42.2@3518.01,3068 3558,3068 3578,3088 3578,3128 3622,3172 U1.10@3898.6,3172
USB1_4: OTGID.1 USB1.4 | length 435.3
  Top Layer w10: USB1.4@1951,3103.4 2002.6,3103.4 2048,3058 2048,2888 2083,2853 OTGID.1@2183,2853
USB1_+5V: D8.1 OTGPW.1 | length 421.5
  Top Layer w14.96: OTGPW.1@2381.5,3260.3 2325.7,3260.3 2296.2,3230.8 2296.2,3004.5 2325.7,2974.9 D8.1@2381.6,2975.4
X1_1: C16.2 U5.15 X1.1 | length 534.3
  Top Layer w10: U5.15@2960.9,2018.1 2960.9,1793.3 X1.1@3052.9,1701.3 3228,1701.3 C16.2@3231.05,1698.3
X1_2: C15.2 U5.14 X1.2 | length 532.6
  Top Layer w10: C15.2@2675.05,1697.8 2849.4,1697.8 X1.2@2852.9,1701.3 2940.9,1789.3 U5.14@2940.9,2018.1
pads on no net: AUNO.32 ETH. ETH.L1@1737.1,1931.1 ETH.L3@1737.1,2344.5 ETH.R4 ETH.R5 FD1.1 FD2.1 FD3.1 FD4.1 INVERSORES.6 INVERSORES.7 U1.20 U1.21 U1.33 U1.58 U1.66 U1.67 U1.69 U1.87 U5.5 U5.6 U5.8 U5.26 U5.44 U5.45 U5.46 U5.48 USB1.

## Polygon pours and split planes (outlines as drawn)
AGND on Bottom Layer "Bottom Layer-AGND" (solid, pour order 0): 3558,2878 3668,2878 3668,3128 3668,3132 3703.7,3132.4 4077.7,3132.4 4078,2798 3988,2798 3989.1,2591.1 4235.2,2345 5121,2345 5121,2039.9 4126.9,2039.9 4126.9,2148.2 3728,2538 3728,2598 3558,2768
GND on Bottom Layer "Bottom Layer-GND" (solid, pour order 1): 7008,4178 7008,1538 4058,1538 4058,2028 5153,2028 5153,2363 4263,2363 4008,2608 4008,2788 4108,2788 4107.2,3161.9 3643.8,3161.9 3648,4178
GND on Bottom Layer "Bottom Layer-GND 1" (solid, pour order 2): 1638,4178 3648,4178 3648,2898 3538,2898 3538,2768 3708,2598 3708,2528 4068,2168 4068,1535 2609,1532 2608,1738 2808,1738 2898,1838 2898,2343 2898,2338 2898,2558 1853,2558 1853,1738 2606,1738 2607,1530 2121,1530 1635,1527
GND on Top Layer "Top Layer-GND" (solid, pour order 3): 1638,4178 7008,4178 7008,1538 2608,1538 2608,1738 2788,1738 2808,1738 2888,1818 2893,2348 2893,2353 2898,2558 2108,2563 1853,2558 1853,1738 2606,1738 2606,1538 1638,1538

## Other copper
Top Layer:
  region net U1_22: 3884.77,2933.59 3914.29,2933.59 3914.29,2915.88 3884.77,2915.88
  region net AGND: 3914.29,2898.16 3884.77,2898.16 3884.77,2868.63 3914.29,2868.63 3914.29,2862.73
  text "TST" at 5614,2207 h80
  text "TE0123.V2" at 5408,2124.4 h80
  text "2ARC" at 5558,2004.4 h80

## Silkscreen, mask and mechanical layers (free items; w line width, h text height)
Top Overlay:
  drawing of 147 lines, arcs and shapes, not listed
  text "PTC13" at 4383.1,4070.5 h25 r90
  text "SCL" at 3324.1,4067.5 h25 r90
  text "SDA" at 3424.1,4067.5 h25 r90
  text "AREF" at 3517.1,4067.9 h25 r90
  text "GND" at 3624.1,4067.5 h25 r90
  text "PTE4" at 3724.1,4067.5 h25 r90
  text "PTE0" at 3924.1,4067.5 h25 r90
  text "PTE1" at 4024.1,4067.5 h25 r90
  text "PTE3" at 4124.1,4067.5 h25 r90
  text "PTE5" at 4224.1,4067.5 h25 r90
  text "PTC10" at 4584.1,4067.5 h25 r90
  text "PTC9" at 4684.1,4067.5 h25 r90
  text "PTC6" at 4984.1,4067.5 h25 r90
  text "PTC5" at 5084.1,4067.5 h25 r90
  text "PTE2" at 3824.1,4067.28 h25 r89
  text "PTC11" at 4484.09,4067.06 h25 r88
  text "PTC8" at 4784.1,4067.28 h25 r89
  text "PTC7" at 4884.09,4067.06 h25 r88
  text "2VREF" at 3058,3991.9 h25
  text "AUNO" at 4038,3838 h80
  text "GND" at 5848,3776.4 h35
  text "PTC16" at 3843,3761.9 h25
  text "PTC14" at 4217,3761.9 h25
  text "GND" at 6600,3720.2 h40
  text "B" at 6676.7,3697.2 h40 r180
  text "2VIN" at 6069.6,3686.5 h35 r90
  text "B" at 6603,3645.2 h40 r180
  text "A" at 6673.1,3592.2 h40 r180
  text "+5" at 5856.91,3591.01 h50 r9
  text "U1VDD" at 3663,3558.9 h50
  text "A" at 6599.4,3543.2 h40 r180
  text "CANH" at 6558.9,3448.2 h40
  text "B" at 6603,3430.2 h40 r180
  text "+3.3" at 2893,3421.7 h50
  text "1-2,4x5:USB_PWR" at 1706,3394.2 h50 r90
  text "2-3,4-5:OTG_ON" at 1790.3,3393.2 h50 r90
  text "CANL" at 6562.6,3335 h40
  text "A" at 6606.57,3321.87 h40 r159
  text "MISO" at 5018,3286.6 h30
  text "U5VDDA" at 2770,3252.7 h50
  text "2VR" at 2239,3244.1 h30
  text "+5V" at 2642,3244.1 h30
  text "PTC1" at 4872.09,3198.56 h25 r88
  text "1" at 2374,3197.7 h35 r180
  text "2" at 2474,3197.7 h35 r180
  text "3" at 2574,3197.7 h35 r180
  text "+5A" at 5297.34,3188.08 h50 r10
  text "PTC0" at 4761.1,3179.7 h25 r90
  text "PB22" at 4652.1,3164.9 h25 r90
  text "LDO" at 3713.01,3151.86 h25
  text "SCK" at 5335.4,3066.4 h30 r90
  text "MOSI" at 5281.8,3064 h30 r90
  text "ADC0_DM0" at 3819.4,3025 h30 r90
  text "VR" at 3725.01,3020.86 h25
  text "AUNO" at 4991.6,2967.8 h80 r90
  text "GND" at 5282.8,2966.8 h30 r90
  text "RST" at 5028,2906.6 h30
  text "AGND" at 3672.1,2887.6 h30 r90
  text "4" at 2286.44,2868.24 h35 r145
  text "5" at 2278,2766.4 h35 r180
  text "U1VDDA" at 3530.3,2663.5 h50 r90
  text "VREF" at 3649.8,2624.2 h40 r90
  text "32.768" at 3734,2612.2 h40
  text "A" at 6599.4,2435.2 h40 r180
  text "TXD3" at 3303,2421.9 h25
  text "TXD2" at 3253,2371.9 h25
  text "NC" at 6637.5,2337.2 h40
  text "B" at 6603,2316.2 h40 r180
  text "DM1" at 4592,2292.6 h30
  text "NC" at 6637.5,2218.2 h40
  text "A" at 6599.4,2209.2 h40 r180
  text "VIN" at 4534.4,2174.1 h30 r90
  text "ADC0" at 4599.4,2172.3 h30 r90
  text "ADC1" at 4679.4,2172.3 h30 r90
  text "ADC0_DP0" at 4779.4,2172.3 h30 r90
  text "ADC1_DP1" at 4879.4,2172.3 h30 r90
  text "ADC0_DP1" at 4979.4,2172.3 h30 r90
  text "RST" at 3833,2169.6 h30
  text "+5VA" at 4011.09,2169.75 h30 r8
  text "AUNO" at 4188,2169.4 h80
  text "A" at 6673.1,2168 h40 r180
  text "B" at 6603,2102 h40 r180
  text "DAC0_OUT" at 5128,2086.6 h30
  text "B" at 6676.7,2057 h40 r180
  text "U5VDDIO" at 3310.3,2053 h50 r90
  text "NC" at 3647,2007.6 h30
  text "+3.3A" at 3808,2007.6 h30
  text "AGND" at 4160,2007.6 h30
  text "TCK TDI TDO TMS EZP" at 4368,1996.6 h30
  text "GND" at 6600,1946.2 h40
  text "+5V" at 5097,1797.6 h30
  text "Data" at 5196.9,1797.6 h30
  text "Clock" at 5303.1,1797.6 h30
  text "GND" at 5425,1797.6 h30
  text "J5V" at 4479,1581.9 h25
  text "GND" at 4574,1581.9 h25
  text "GND" at 4787,1581.9 h25
  text "RST" at 4368,1576.6 h30
  text "REF" at 4678,1576.6 h30
  text "25MHz" at 2853,1545.7 h50

## Text inside footprints (layer, text, board x,y; h text height)
JTAG: Document "1" at 4318.3,1742.3 h30 r180
SPK: Document "+" at 5150.68,2783.68 h50 r135